# Altium PCB DeskTouch.PcbDoc
Units mm, origin at the board's own origin, x right, y up, seen from the top; angles counter-clockwise.
Board outline 122.3 x 21.21 mm, 2 copper layers (Top Layer, Bottom Layer); 40 components, 54 nets, 128 pads, 27 vias.
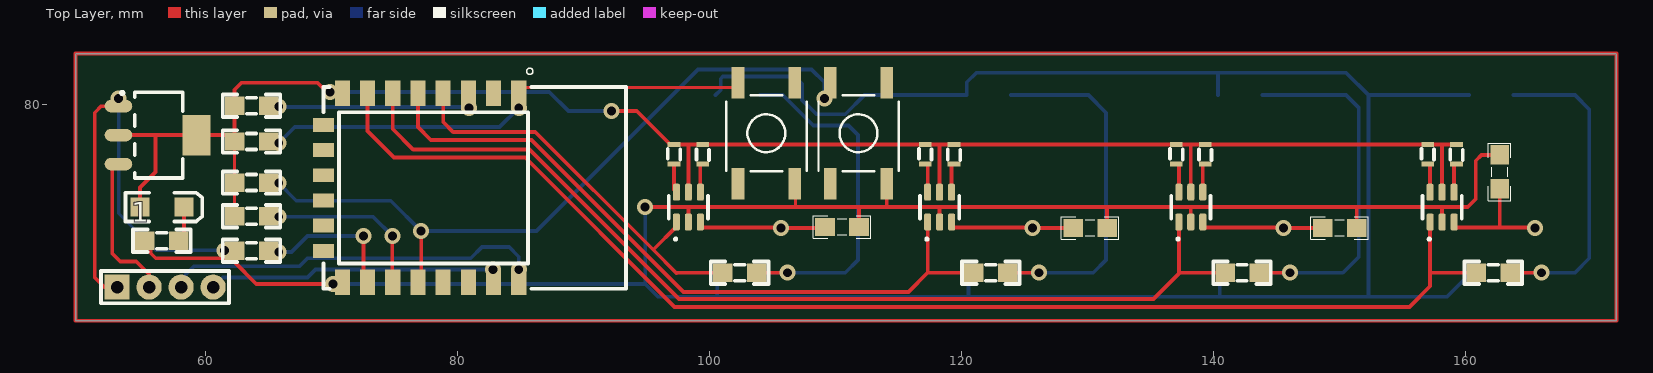
[diagram p0: Top Layer view]
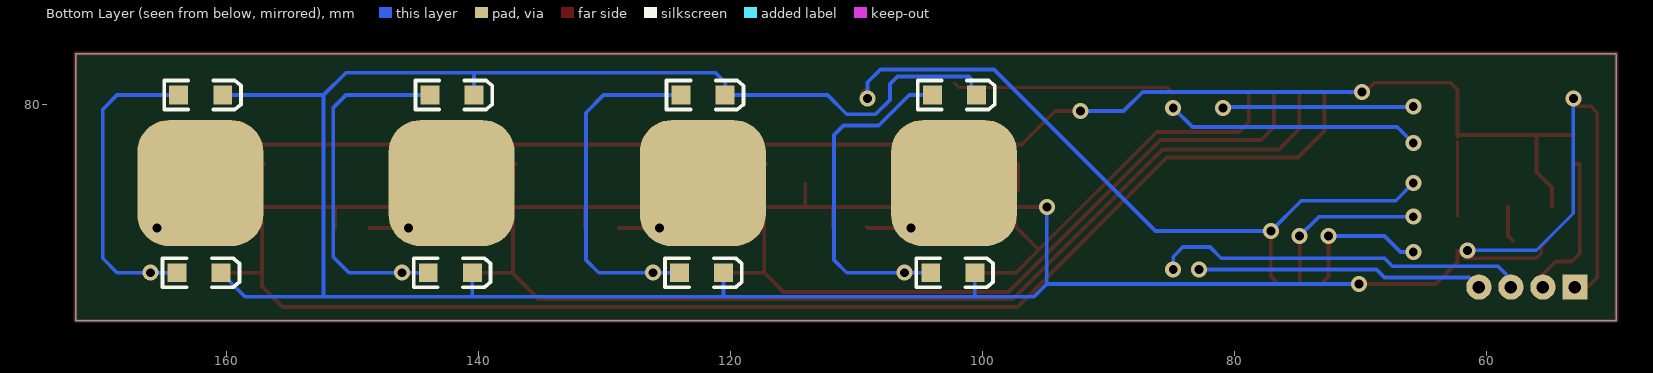
[diagram p1: Bottom Layer view, seen from below]
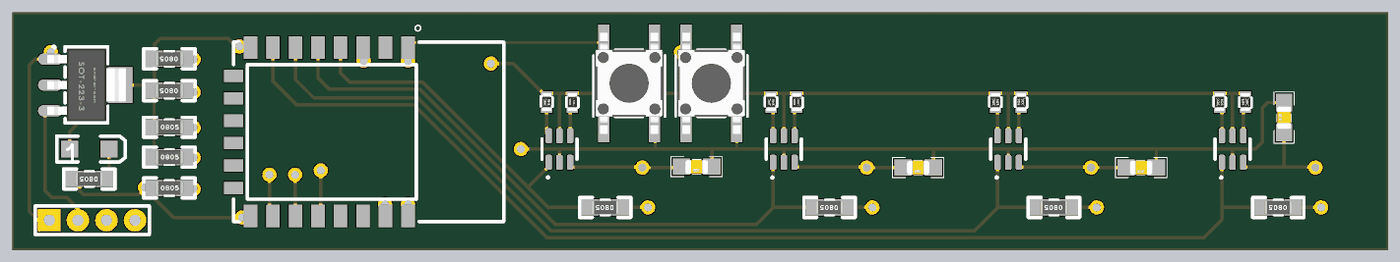
[diagram p2: 3D render of the assembled board from above, using the file's embedded part models]

## Layer stack, top to bottom
Top Solder: solder mask 0.0102, Solder Resist, Dk 3.5
Top Layer: signal copper 0.0356
Dielectric 1: dielectric 0.32, FR-4, Dk 4.8
Bottom Layer: signal copper 0.0356
Bottom Solder: solder mask 0.0102, Solder Resist, Dk 3.5

## Board outline
49.657,62.865 49.657,84.074 171.958,84.074 171.958,62.865

## Design rules (kind name [scope] priority, off if disabled: settings)
Clearance [All] p1: gap=0.254 ignorepadtopadclearanceinfootprint=FALSE except(0: Arc-Hole Track-Hole SMDPad-Hole THPad-Hole Via-Hole Fill-Hole Poly-Hole Region-Hole Text-Hole)
PolygonConnect [All] p1: connectstyle=Relief reliefconductorwidth=0.254 reliefentries=4 polygonreliefangle="90 Angle" airgapwidth=0.254
RoutingVias [All] p1: holewidth=0.711 width=1.27 viastyle="Through Hole" minholewidth=0.711 minwidth=1.27 maxholewidth=0.711 maxwidth=1.27
SolderMaskExpansion [All] p1: expansion=0.102
Width [All] p1: maxlimit=10 minlimit=0.1 preferedwidth=0.254
30 further rules are at their usual default settings.

## Components (designator, comment, footprint, x,y, rotation, side; value= is the part's Value field where it differs from the comment)
1 "Comment" RESC3413X04N 56.515,69.215 r180 top
D11 "LED2" 3.2X1.6X1.1 102.334,66.675 r180 bottom
D11 "LED2" 3.2X1.6X1.1 102.207,80.772 r180 bottom
D11 "LED2" 3.2X1.6X1.1 122.273,66.675 r180 bottom
D11 "LED2" 3.2X1.6X1.1 122.146,80.772 r180 bottom
D11 "LED2" 3.2X1.6X1.1 142.212,66.675 r180 bottom
D11 "LED2" 3.2X1.6X1.1 142.085,80.772 r180 bottom
D11 "LED2" 3.2X1.6X1.1 162.024,80.772 r180 bottom
D11 "LED2" 3.2X1.6X1.1 162.151,66.675 r180 bottom
D11 "LED2" 3.2X1.6X1.1 56.515,71.882 r0 top
P1 "Header 4" HDR1X4 52.959,65.532 r0 top
U1 "ESP8266-12E/ESP-12E" XCVR_ESP8266-12E/ESP-12E 77.836,73.413 r270 top
? "Comment" RESC3413X04N 102.362,66.675 r180 top
? "Comment" RESC3413X04N 122.301,66.675 r180 top
? "Comment" RESC3413X04N 142.24,66.675 r180 top
? "Comment" RESC3413X04N 162.179,66.675 r180 top
? "Comment" CAPC3413X12N 162.687,74.676 r90 top
? "Comment" CAPC3413X12N 149.987,70.231 r180 top
? "Comment" CAPC3413X12N 130.175,70.231 r180 top
? "Comment" CAPC3413X12N 110.49,70.307 r180 top
? "Comment" SW-PB 104.485,77.749 r90 top
? "Comment" SW-PB 111.796,77.749 r90 top
? "Comment" MY_RES_SMD_0603 156.972,76.073 r270 top
? "Comment" MY_RES_SMD_0603 159.258,76.073 r90 top
? "Comment" SOT95P285X126-6N 158.115,71.882 r90 top
? "Comment" MY_RES_SMD_0603 137.033,76.073 r270 top
? "Comment" MY_RES_SMD_0603 139.319,76.073 r90 top
? "Comment" SOT95P285X126-6N 138.176,71.882 r90 top
? "Comment" SOT95P285X126-6N 118.237,71.882 r90 top
? "Comment" MY_RES_SMD_0603 119.38,76.073 r90 top
? "Comment" MY_RES_SMD_0603 117.094,76.073 r270 top
? "Comment" MY_RES_SMD_0603 97.155,76.073 r270 top
? "Comment" MY_RES_SMD_0603 99.441,76.073 r90 top
? "Comment" SOT223 56.261,77.597 r0 top
? "Comment" RESC3413X04N 63.627,73.826 r0 top
? "Comment" RESC3413X04N 63.627,71.159 r0 top
? "Comment" RESC3413X04N 63.627,68.413 r0 top
? "Comment" RESC3413X04N 63.627,79.931 r180 top
? "Comment" RESC3413X04N 63.627,77.089 r180 top
? "Comment" SOT95P285X126-6N 98.298,71.882 r90 top

## Footprints (in the part's own frame and the unit in brackets; to place one, negate y for a bottom-side part, rotate by r counter-clockwise, add the part's x,y. Pads: shape width x height; smd on the part's side, far side on the other; paste and mask are expansions set on the pad)
3.2X1.6X1.1 [mm] "SMT LED; 2 Flat Leads"
  rect 1.5x1.5 smd: 1(-1.75,0) 2(1.75,0)
  silkscreen extent -2.9,-1.15 3.2,1.15
CAPC3413X12N [mm] "Chip Capacitor, 2-Leads, Body 3/40x1/30mm, IPC Medium Density-Design:Abbas Basereh"
  rect 1.55x1.45 smd: 1(-1.35,0) 2(1.35,0)
  silkscreen extent -2.29,-0.89 2.29,0.89, body extent -1,-0.62 1,0.63, height 0.78
HDR1X4 [mm] "Connector; Header; 4 Position"
  rect 2x2 hole 1: 1(0,0)
  round 2 hole 1: 2(2.54,0) 3(5.08,0) 4(7.62,0)
  silkscreen extent -1.27,-1.27 8.89,1.27
MY_RES_SMD_0603 [mm]
  rect 0.4x1 smd: 1(-0.775,0) 2(0.775,0)
  silkscreen extent -0.45,-0.5 0.4,0.5, body extent -0.78,-0.43 0.78,0.43, height 0.45
RESC3413X04N [mm] "Chip Resistor, 2-Leads, Body 3/40x1/30mm, IPC Medium Density-Design:Abbas Basereh"
  rect 1.55x1.45 smd: 1(-1.35,0) 2(1.35,0)
  silkscreen extent -2.29,-0.89 2.29,0.89, body extent -1.25,-0.62 1.25,0.62, height 0.79
SOT95P285X126-6N [mm]
  rrect50% 1.35x0.57 smd: 1(-1.185,0.95) 2(-1.185,0) 3(-1.185,-0.95) 4(1.185,-0.95) 5(1.185,0) 6(1.185,0.95)
  silkscreen extent -2.64,-1.56 0.9,1.56
SOT223 [mm] "SOT223, 4-Leads, Body 6.5x3.5mm, Pitch 2.30mm-Designer Abbas Basereh"
  oval 2.2x1 smd: 1(-3.2,2.3) 2(-3.2,0) 3(-3.2,-2.3)
  rect 2.2x3.2 smd: 4(3,0)
  Top Layer pour cut-out: -1.7,3.556 1.7,3.556 1.7,-3.556 -1.7,-3.556
  silkscreen extent -3.02,-3.4 1.9,3.47, body extent -3.5,-3.25 3.5,3.25, height 1.7
SW-PB [mm]
  rect 2.5x1 smd: 1(-3.992,2.25) 1(3.992,2.25) 2(-3.992,-2.25) 2(3.992,-2.25)
  silkscreen extent -3,-3.2 3,3.17, body extent -4.5,-3 4.5,3, height 5
XCVR_ESP8266-12E/ESP-12E [mm]
  rect 2x1.2 smd: 1(-7.5,7) 2(-7.5,5) 3(-7.5,3) 4(-7.5,1) 5(-7.5,-1) 6(-7.5,-3) 7(-7.5,-5) 8(-7.5,-7) 15(7.5,-7) 16(7.5,-5) 17(7.5,-3) 18(7.5,-1) 19(7.5,1) 20(7.5,3) 21(7.5,5) 22(7.5,7)
  rect 1.1x1.7 smd: 9(-5,-8.5) 10(-3,-8.5) 11(-1,-8.5) 12(1,-8.5) 13(3,-8.5) 14(5,-8.5)
  silkscreen extent -9.5,-8.5 8,15.5

## Part data
D11 D11 D11 D11 D11 D11 D11 D11 D11: "Typical RED, GREEN, YELLOW, AMBER GaAs LED", LatestRevisionDate=17-Jul-2002, LatestRevisionNote="Re-released for DXP Platform.", PackageDescription="SM LED; 2 Flat Leads", PackageReference=3.2X1.6X1.1, PackageVersion=Feb-2002, Published=8-Jun-2000, Publisher="Altium Limited"
P1: "Header, 4-Pin", LatestRevisionDate=17-Jul-2002, LatestRevisionNote="Re-released for DXP Platform.", Publisher="Altium Limited"
U1: Package=None, Availability=Unavailable, MP=ESP8266-12E/ESP-12E, Price=None

## Free pads (board coordinates)
  rrect50% 10x10 smd far side: 3(102.235,73.787) 3(122.174,73.787) 3(142.113,73.787)
  rrect50% 10x10 smd far side mask+0.102: 3(162.052,73.787)

## Via types
v1: diameter 1.27, hole 0.711, Top Layer to Bottom Layer, 27 vias

## Nets (pads, with @x,y where several pads share a name; then routed paths per layer and width w, separated by ;. In a path a pad name is that pad's centre, name@x,y a point inside that pad or via, vN(x,y) a via of type N, cw(c..) or ccw(c..) an arc to the next point about the centre after c; other vN are vias at no path point)
AHLB1: ?.1@99.441,75.298 ?.4@99.248,73.067 | length 2.4
  Top Layer w0.3: ?.4@99.248,73.067 99.248,75.225 99.321,75.298 ?.1@99.441,75.298
AHLB2: ?.1@119.38,75.298 ?.4@119.187,73.067 | length 2.4
  Top Layer w0.3: ?.4@119.187,73.067 119.187,75.225 119.26,75.298 ?.1@119.38,75.298
AHLB3: ?.1@139.319,75.298 ?.4@139.126,73.067 | length 2.4
  Top Layer w0.3: ?.4@139.126,73.067 139.126,75.225 139.199,75.298 ?.1@139.319,75.298
AHLB4: ?.1@159.258,75.298 ?.4@159.065,73.067 | length 2.4
  Top Layer w0.3: ?.4@159.065,73.067 159.065,75.225 159.138,75.298 ?.1@159.258,75.298
AHLB5: 
EN: ?.1@64.977,79.931 U1.3 | length 15.2
  Bottom Layer w0.3: v1(65.786,79.883) 65.849,79.819 80.835,79.819 v1(80.899,79.756)
FLASH: ?.1@109.546,81.741 ?.2@64.977,73.826 U1.18 | length 57.1
  Top Layer w0.3: U1.18 76.708,66.041 77.089,66.422 v1(77.089,69.977) ; v1(109.093,80.501) 109.546,80.954 ?.1@109.347,81.153
  Bottom Layer w0.3: v1(65.786,73.787) 67.183,72.39 74.676,72.39 v1(77.089,69.977) 86.233,69.977 99.06,82.804 108.077,82.804 109.093,81.788 v1(109.093,80.501)
GND: 1.2 ?.1@53.061,79.897 ?.1@62.277,68.413 ?.1@111.84,70.307 ?.1@131.525,70.231 ?.1@151.337,70.231 ?.2@98.298,70.697 ?.2@106.735,73.756 ?.2@114.046,73.756 ?.2@118.237,70.697 ?.2@138.176,70.697 ?.2@158.115,70.697 ?.2@162.687,76.026 D11.2@100.457,80.772 D11.2@100.584,66.675 D11.2@120.396,80.772 D11.2@120.523,66.675 D11.2@140.335,80.772 D11.2@140.462,66.675 D11.2@160.274,80.772 D11.2@160.401,66.675 P1.1 U1.15 | length 325.3
  Top Layer w0.254: ?.2@106.735,73.756 106.807,73.684 106.807,71.882 ; ?.2@114.046,73.756 114.046,72.009 114.173,71.882 ; ?.2@138.176,70.697 138.176,71.882
  Top Layer w0.3: P1.1 51.943,65.532 51.181,66.294 51.181,79.375 51.703,79.897 ?.1@53.061,79.897 ; 1.2 55.626,68.754 55.626,68.221 56.029,67.818 61.682,67.818 62.277,68.413 62.277,67.517 64.008,65.786 v1(70.104,65.786) ; v1(94.869,71.882) 98.298,71.882 ; ?.2@98.298,70.697 98.298,71.882 ; ?.1@111.84,70.307 111.84,71.802 111.76,71.882 ; ?.2@118.237,70.697 118.237,71.882 ; ?.1@131.525,70.231 131.525,71.835 131.572,71.882 ; ?.1@151.337,70.231 151.337,71.802 151.257,71.882 ; ?.2@158.115,70.697 158.115,71.882 ; ?.2@162.687,76.026 161.243,76.026 160.782,75.565 160.782,72.517 160.147,71.882 158.115,71.882 ; 98.298,71.882 106.807,71.882 111.76,71.882 ; 111.76,71.882 114.173,71.882 118.237,71.882 ; 118.237,71.882 131.572,71.882 ; 131.572,71.882 138.176,71.882 151.257,71.882 ; 151.257,71.882 158.115,71.882
  Bottom Layer w0.254: v1(53.086,80.518) 53.086,71.374 56.007,68.453 v1(61.468,68.453)
  Bottom Layer w0.3: v1(70.104,65.786) 94.869,65.786 ; v1(94.869,71.882) 94.869,65.786 ; D11.2@100.457,80.772 100.87,81.185 100.87,82.074 101.046,82.25 106.726,82.25 107.315,81.661 107.315,80.391 108.458,79.248 110.744,79.248 112.268,80.772 120.396,80.772 120.396,81.788 121.158,82.55 140.335,82.55 ; D11.2@100.584,66.675 100.584,64.897 100.457,64.77 ; D11.2@120.523,66.675 120.523,64.77 ; D11.2@140.335,80.772 140.335,82.55 ; D11.2@140.462,66.675 140.462,64.77 ; D11.2@160.274,80.772 152.273,80.772 ; D11.2@160.401,66.675 158.496,64.77 152.273,64.77 ; 94.869,65.786 95.885,64.77 100.457,64.77 ; 100.457,64.77 120.523,64.77 ; 120.523,64.77 140.462,64.77 ; 140.335,82.55 150.495,82.55 152.273,80.772 ; 140.462,64.77 152.273,64.77 ; 152.273,64.77 152.273,80.772
HIGHLOW1: 
HIGHLOW2: 
HIGHLOW3: 
HIGHLOW4: 
HIGHLOW5: 
IN1: 
IN2: 
IN3: 
IN4: 
IN5: 
LED1: ?.1@103.712,66.675 D11.1@103.957,80.772 D11.1@104.084,66.675 | length 29.6
  Top Layer w0.3: ?.1@103.712,66.675 v1(106.172,66.675)
  Bottom Layer w0.3: D11.1@103.957,80.772 105.791,80.772 108.204,78.359 110.998,78.359 111.76,77.597 111.76,67.691 110.744,66.675 v1(106.172,66.675) D11.1@104.084,66.675
LED2: ?.1@123.651,66.675 D11.1@123.896,80.772 D11.1@124.023,66.675 | length 30.1
  Top Layer w0.3: ?.1@123.651,66.675 v1(126.111,66.675)
  Bottom Layer w0.3: D11.1@123.896,80.772 130.048,80.772 131.445,79.375 131.445,67.691 130.429,66.675 v1(126.111,66.675) D11.1@124.023,66.675
LED3: ?.1@143.59,66.675 D11.1@143.835,80.772 D11.1@143.962,66.675 | length 30.4
  Top Layer w0.3: ?.1@143.59,66.675 v1(146.05,66.675)
  Bottom Layer w0.3: D11.1@143.835,80.772 150.495,80.772 151.511,79.756 151.511,67.945 150.241,66.675 v1(146.05,66.675) D11.1@143.962,66.675
LED4: ?.1@163.529,66.675 D11.1@163.774,80.772 D11.1@163.901,66.675 | length 27.1
  Top Layer w0.3: ?.1@163.529,66.675 v1(165.989,66.675)
  Bottom Layer w0.3: D11.1@163.774,80.772 168.656,80.772 169.799,79.629 169.799,67.818 168.656,66.675 v1(165.989,66.675) D11.1@163.901,66.675
LED5: 
OUT1: ?.1@97.348,70.697 ?.2@101.012,66.675 U1.4 | length 32.4
  Top Layer w0.3: U1.4 78.836,78.644 79.629,77.851 86.147,77.851 95.504,68.494 ; 97.348,66.65 97.323,66.675 ; ?.1@97.348,70.697 97.348,70.338 95.504,68.494 ; ?.2@101.012,66.675 97.323,66.675 ; 95.504,68.494 97.323,66.675
OUT2: ?.1@117.287,70.697 ?.2@120.951,66.675 U1.5 | length 56.9
  Top Layer w0.3: U1.5 76.836,78.232 77.852,77.216 85.852,77.216 97.917,65.151 115.763,65.151 117.287,66.675 ; ?.1@117.287,70.697 117.287,66.675 ; ?.2@120.951,66.675 117.287,66.675
OUT3: ?.1@137.226,70.697 ?.2@140.89,66.675 U1.6 | length 79.4
  Top Layer w0.3: U1.6 74.836,78.072 76.454,76.454 85.685,76.454 97.542,64.597 135.209,64.597 137.226,66.614 ; ?.1@137.226,70.697 137.226,66.614 ; ?.2@140.89,66.675 137.287,66.675 137.226,66.614
OUT4: ?.1@157.165,70.697 ?.2@160.829,66.675 U1.7 | length 102.5
  Top Layer w0.3: U1.7 72.836,77.913 74.93,75.819 85.344,75.819 97.201,63.962 155.529,63.962 157.165,65.598 157.165,66.675 ; ?.1@157.165,70.697 157.165,66.675 ; ?.2@160.829,66.675 157.165,66.675
OUT5: 
POWER: 1.1 D11.2@58.265,71.882 | length 2.8
  Top Layer w0.3: 1.1 58.265,69.615 D11.2@58.265,71.882
RES1: ?.2@64.977,68.413 U1.16 | length 11.1
  Top Layer w0.3: v1(72.517,69.596) 72.517,66.356 72.898,65.975 U1.16
  Bottom Layer w0.3: v1(65.786,68.326) 66.802,68.326 68.072,69.596 v1(72.517,69.596)
RES2: ?.2@64.977,71.159 U1.17 | length 13.3
  Top Layer w0.3: v1(74.803,69.596) 74.803,65.946 U1.17
  Bottom Layer w0.3: v1(65.786,71.12) 73.279,71.12 v1(74.803,69.596)
RES3: 
RES4: 
RES5: 
RST: ?.1@64.977,77.089 ?.1@102.235,81.741 U1.1 | length 37.9
  Top Layer w0.254: U1.1 85.309,81.386 101.88,81.386 ?.1@102.235,81.741
  Bottom Layer w0.3: v1(65.786,76.962) 67.056,78.232 83.312,78.232 v1(84.836,79.756)
RX: P1.4 U1.21 | length 22.8
  Bottom Layer w0.3: P1.4 61.341,66.294 68.072,66.294 68.707,66.929 v1(82.804,66.929)
T1: ?.2@109.14,70.307 ?.3@99.248,70.697 pad.3@102.235,73.787 | length 10.3
  Top Layer w0.3: ?.3@99.248,70.697 99.248,70.418 99.405,70.261 105.634,70.261 v1(105.664,70.231) 109.064,70.231 ?.2@109.14,70.307
T2: ?.2@128.825,70.231 ?.3@119.187,70.697 pad.3@122.174,73.787 | length 10
  Top Layer w0.3: ?.3@119.187,70.697 119.187,70.418 119.344,70.261 125.573,70.261 v1(125.603,70.231) ?.2@128.825,70.231
T3: ?.2@148.637,70.231 ?.3@139.126,70.697 pad.3@142.113,73.787 | length 9.9
  Top Layer w0.3: ?.3@139.126,70.697 139.126,70.418 139.283,70.261 145.512,70.261 v1(145.542,70.231) ?.2@148.637,70.231
T4: ?.1@162.687,73.326 ?.3@159.065,70.697 pad.3@162.052,73.787 | length 9.8
  Top Layer w0.3: ?.3@159.065,70.697 159.065,70.418 159.222,70.261 162.687,70.261 ; ?.1@162.687,73.326 162.687,70.261 ; v1(165.481,70.231) 165.451,70.261 162.687,70.261
T5: 
TOG1: ?.2@97.155,75.298 ?.6@97.348,73.067 | length 2.3
  Top Layer w0.3: ?.2@97.155,75.298 97.155,73.26 ?.6@97.348,73.067
TOG2: ?.2@117.094,75.298 ?.6@117.287,73.067 | length 2.4
  Top Layer w0.3: ?.2@117.094,75.298 117.214,75.298 117.287,75.225 ?.6@117.287,73.067
TOG3: ?.2@137.033,75.298 ?.6@137.226,73.067 | length 2.4
  Top Layer w0.3: ?.2@137.033,75.298 137.153,75.298 137.226,75.225 ?.6@137.226,73.067
TOG4: ?.2@156.972,75.298 ?.6@157.165,73.067 | length 2.4
  Top Layer w0.3: ?.2@156.972,75.298 157.092,75.298 157.165,75.225 ?.6@157.165,73.067
TOG5: 
TOGGLE1: 
TOGGLE2: 
TOGGLE3: 
TOGGLE4: 
TOGGLE5: 
TX: P1.3 U1.22 | length 29.8
  Bottom Layer w0.3: P1.3 58.373,65.866 58.373,66.501 59.055,67.183 67.437,67.183 68.072,67.818 81.026,67.818 81.915,68.707 84.074,68.707 84.836,67.945 v1(84.836,66.929)
VCC: ?.1@62.277,71.159 ?.1@62.277,73.826 ?.1@97.155,76.848 ?.1@117.094,76.848 ?.1@137.033,76.848 ?.1@156.972,76.848 ?.2@53.061,77.597 ?.2@62.277,77.089 ?.2@62.277,79.931 ?.2@99.441,76.848 ?.2@119.38,76.848 ?.2@139.319,76.848 ?.2@159.258,76.848 ?.4@59.261,77.597 ?.5 D11.1@54.765,71.882 U1.8 | length 140.6
  Top Layer w0.254: ?.1@62.277,71.159 62.277,73.826 ?.2@62.277,77.089
  Top Layer w0.3: ?.2@53.061,77.597 56.007,77.597 ; D11.1@54.765,71.882 54.765,73.434 56.007,74.676 56.007,77.597 ; U1.8 70.717,81.032 70.711,81.026 v1(69.85,81.026) 69.596,81.026 68.872,81.75 62.827,81.75 62.277,81.2 62.277,79.931 62.277,77.47 62.15,77.597 59.261,77.597 56.007,77.597 ; v1(92.202,79.502) 94.201,79.502 96.855,76.848 97.155,76.848 98.298,76.848 ; ?.5@98.298,73.067 98.298,76.848 ; ?.5@118.237,73.067 118.237,76.848 ; ?.5@138.176,73.067 138.176,76.848 ; ?.5@158.115,73.067 158.115,76.848 ; ?.2@159.258,76.848 158.115,76.848 ; 98.298,76.848 99.441,76.848 117.094,76.848 118.237,76.848 ; 118.237,76.848 137.033,76.848 138.176,76.848 ; 138.176,76.848 139.319,76.848 156.972,76.848 158.115,76.848
  Bottom Layer w0.3: v1(69.85,81.026) 87.249,81.026 88.773,79.502 v1(92.202,79.502)
VIN: ?.3@53.061,75.297 P1.2 | length 12.2
  Top Layer w0.3: ?.3@53.061,75.297 52.578,75.297 52.578,68.199 53.213,67.564 54.483,67.564 55.499,66.548 P1.2
pads on no net: ?.1@102.235,73.756 ?.1@109.546,73.756 ?.2@106.735,81.741 ?.2@114.046,81.741 U1.2 U1.9 U1.10 U1.11 U1.12 U1.13 U1.14 U1.19 U1.20
copper on no net: | length 287
  Top Layer w0.3: 49.657,62.865 50.927,62.865 171.958,62.865 171.958,77.597 171.958,84.074 49.657,84.074 49.657,62.865